# EAGLE board MICRO_SQUARED_SENSING_MCP1700_3 (EAGLE 7.5.0)
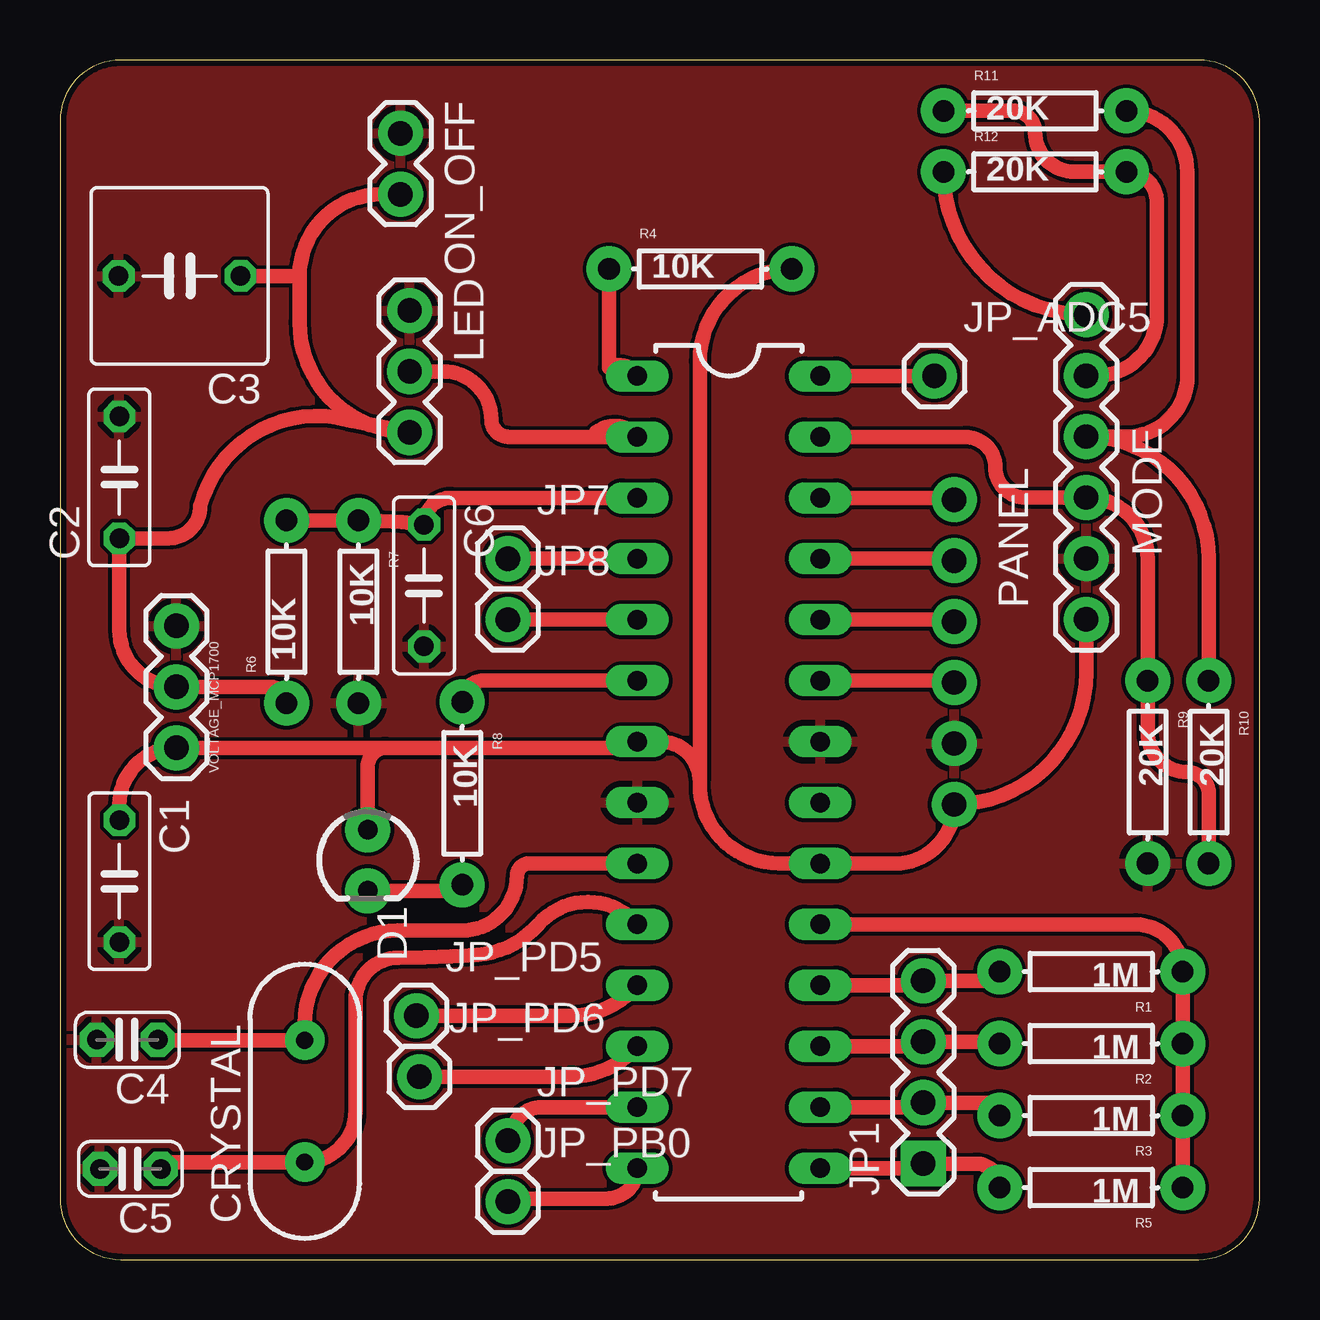
[diagram p0: board, top side]
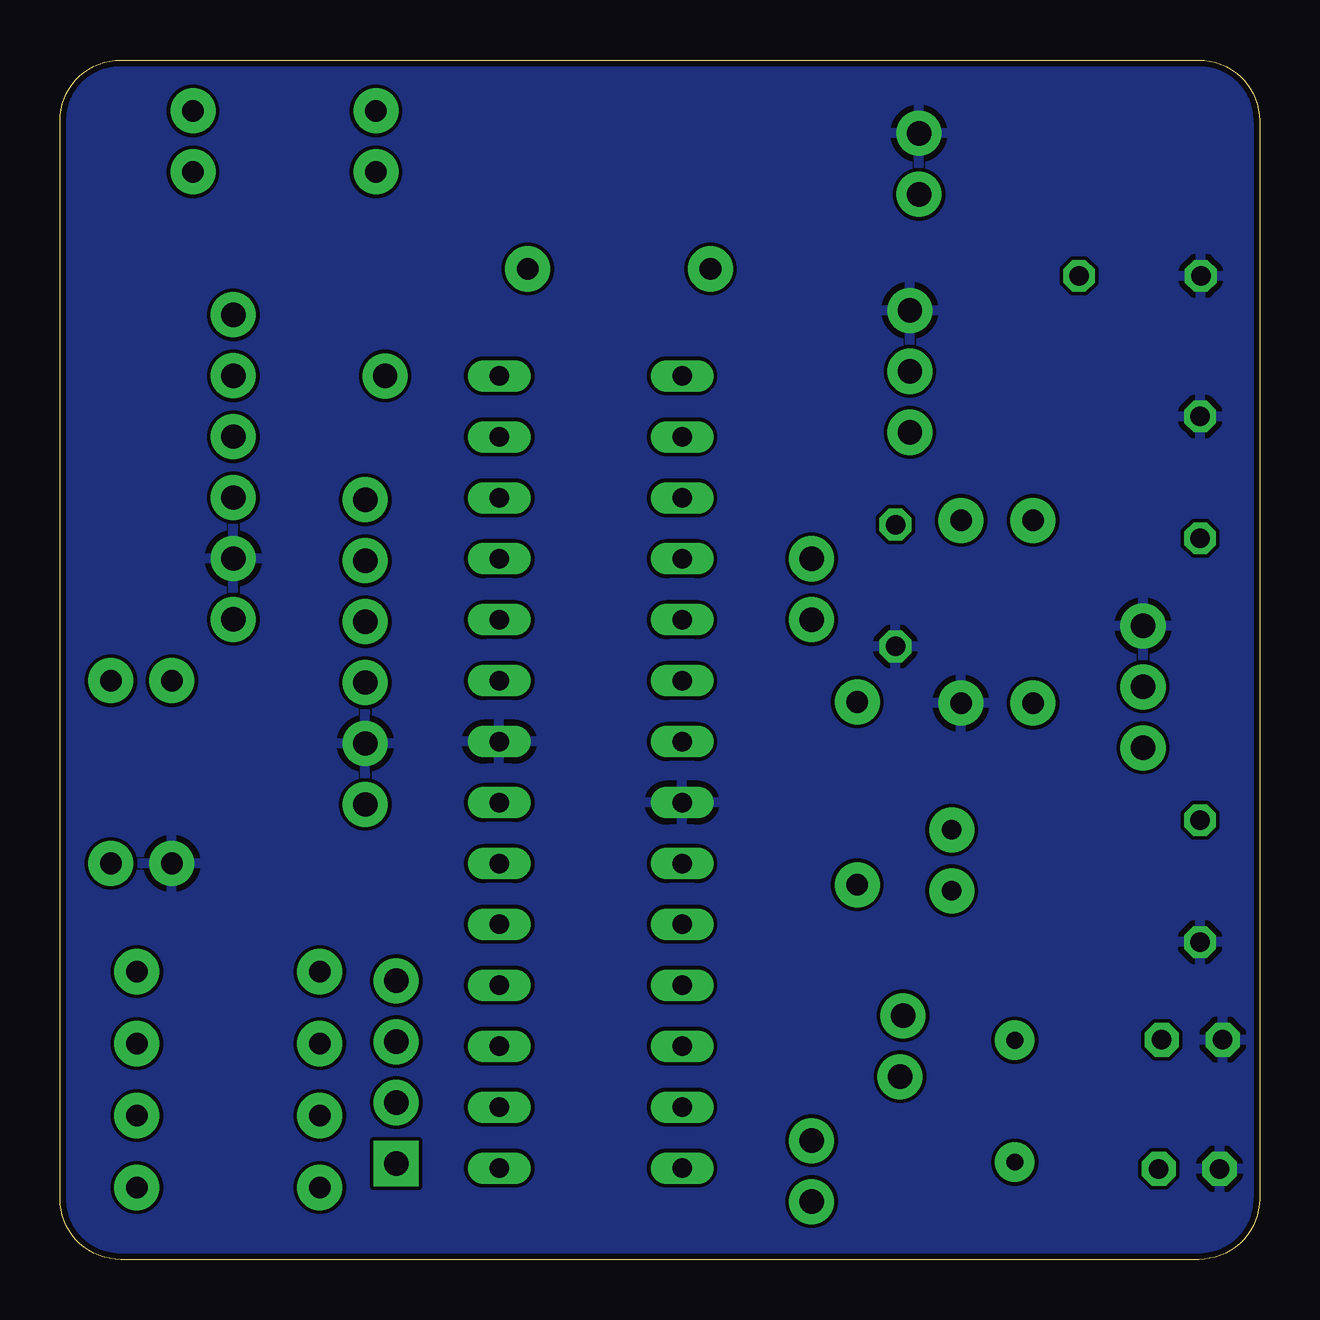
[diagram p1: board, bottom side, seen from below]

Size 50 x 50 mm. Coordinates in mm from the lower left corner, seen from the top.
Outline: 0,47.46 0,2.54 arc90 2.54,0 47.46,0 arc90 50,2.54 50,47.46 arc90 47.46,50 2.54,50 arc90 0,47.46
Copper layers (1*16): Top 0.035mm / dielectric 1.5mm / Bottom 0.035mm
Design rules "seeedstudio_2l_gru": minimum track width 6mil, minimum drill 12mil, track to track 6mil, track to pad 6mil, pad to pad 6mil, via to via 6mil, smd to smd 0mil, copper to edge 10mil, drill to drill 10mil, minimum pad ring 10mil, minimum via ring 6mil, stop-mask expansion 2mil, vias tented up to drill 100mil, thermal gap 10mil
Net classes: 0 default: width 0.254 mm

## Footprints (pad centres in the part's own frame; a part is rotated, then mirrored left to right if it is on the bottom)
DIL-28-3 = drill 0.813 long: 1 -16.51,-3.81; 2 -13.97,-3.81; 3 -11.43,-3.81; 4 -8.89,-3.81; 5 -6.35,-3.81; 6 -3.81,-3.81; 7 -1.27,-3.81; 8 1.27,-3.81; 9 3.81,-3.81; 10 6.35,-3.81; 11 8.89,-3.81; 12 11.43,-3.81; 13 13.97,-3.81; 14 16.51,-3.81; 15 16.51,3.81; 16 13.97,3.81; 17 11.43,3.81; 18 8.89,3.81; 19 6.35,3.81; 20 3.81,3.81; 21 1.27,3.81; 22 -1.27,3.81; 23 -3.81,3.81; 24 -6.35,3.81; 25 -8.89,3.81; 26 -11.43,3.81; 27 -13.97,3.81; 28 -16.51,3.81
C050-025X075 = drill 0.813 octagon: 1 -2.54,0; 2 2.54,0
C050-075X075 = drill 0.813 octagon: 1 -2.54,0; 2 2.54,0
C025-024X044 = drill 0.813 pad 1.422 octagon: 1 -1.27,0; 2 1.27,0
HC49US = drill 0.7 pad 1.651: 1 -2.54,0; 2 2.54,0
LED3MM = drill 0.813 pad 1.88: A -1.27,0; K 1.27,0
1X04 = drill 1.016 pad 1.88 square: 1 0,0 | drill 1.016 pad 1.88: 2 2.54,0; 3 5.08,0; 4 7.62,0
1X01 = drill 1.016 pad 1.88: 1 0,0
1X03 = drill 1.016 pad 1.88: 1 0,0; 2 2.54,0; 3 5.08,0
1X06 = drill 1.016 pad 1.88: 1 0,0; 2 2.54,0; 3 5.08,0; 4 7.62,0; 5 10.16,0; 6 12.7,0
1X02 = drill 1.016 pad 1.88: 1 0,0; 2 2.54,0
1X06_NO_SILK = drill 1.016 pad 1.88: 1 0,0; 2 2.54,0; 3 5.08,0; 4 7.62,0; 5 10.16,0; 6 12.7,0
AXIAL-0.3 = drill 0.9 pad 1.88: P$1 -3.81,0; P$2 3.81,0

## Placement (x,y rotation side)
BRAIN  ATMEGA328P_PDIP  [DIL-28-3]  27.88,20.32 270 top
C1  1u  [C050-025X075]  2.48,15.77 270 top
C2  1u  [C050-025X075]  2.47,32.6 90 top
C3  1000uF  [C050-075X075]  4.98,41 180 top
C4  22pF  [C025-024X044]  2.8,9.16 180 top
C5  22pF  [C025-024X044]  2.93,3.78 180 top
C6  1u  [C050-025X075]  15.17,28.09 270 top
CRYSTAL  [HC49US]  10.2,6.6 90 top
D1  [LED3MM]  12.83,16.64 270 top
JP1  [1X04]  35.98,4 90 top
JP7  [1X01]  18.67,29.21 0 top
JP8  [1X01]  18.67,26.67 0 top
JP_ADC5  [1X01]  36.45,36.83 0 top
JP_PB0  [1X01]  18.67,2.41 0 top
JP_PD5  [1X01]  14.86,10.16 0 top
JP_PD6  [1X01]  14.99,7.62 0 top
JP_PD7  [1X01]  18.67,4.95 0 top
LED  [1X03]  14.57,39.56 270 top
MODE  [1X06]  42.77,26.68 90 top
ON_OFF  [1X02]  14.19,46.94 270 top
PANEL  [1X06_NO_SILK]  37.27,31.67 270 top
R1  1M  [AXIAL-0.3]  42.98,12 180 top
R2  1M  [AXIAL-0.3]  42.98,9 180 top
R3  1M  [AXIAL-0.3]  42.98,6 180 top
R4  10K  [AXIAL-0.3]  26.69,41.29 0 top
R5  1M  [AXIAL-0.3]  42.98,3 180 top
R6  10K  [AXIAL-0.3]  9.44,27 90 top
R7  10K  [AXIAL-0.3]  12.44,27 270 top
R8  10K  [AXIAL-0.3]  16.76,19.43 270 top
R9  20K  [AXIAL-0.3]  45.34,20.32 270 top
R10  20K  [AXIAL-0.3]  47.88,20.32 270 top
R11  20K  [AXIAL-0.3]  40.64,47.88 0 top
R12  20K  [AXIAL-0.3]  40.64,45.34 0 top
VOLTAGE_MCP1700  [1X03]  4.85,21.33 90 top

## Library data of the parts
BRAIN = RodrigoMarques_Parts
C1-C6 = adafruit
CRYSTAL = SparkFun-FreqCtrl
D1 = SparkFun-LED
JP1 JP7 JP8 JP_ADC5 JP_PB0 JP_PD5-JP_PD7 LED ON_OFF VOLTAGE_MCP1700 = SparkFun-Connectors
MODE PANEL = SparkFun-Connectors; PROD_ID: CONN-08437
R1-R12 = SparkFun-Passives

## Nets
BLUE_BRAIN: BRAIN.25 PANEL.2
GND: BRAIN.8 BRAIN.22 C1.2 C2.2 C3.2 C4.2 C5.2 C6.2 LED.1 MODE.2 ON_OFF.1 PANEL.5 R7.P$2 R9.P$2 VOLTAGE_MCP1700.3
GREEN_BRAIN: BRAIN.24 PANEL.3
LEDS_BRAIN: BRAIN.2 LED.2
N$1: BRAIN.3 C6.1 R6.P$2 R7.P$1
N$2: BRAIN.15 JP1.1 R5.P$2
N$3: BRAIN.16 JP1.2 R3.P$2
N$4: BRAIN.17 JP1.3 R2.P$2
N$5: BRAIN.18 JP1.4 R1.P$2
N$6: BRAIN.19 R1.P$1 R2.P$1 R3.P$1 R5.P$1
N$7: BRAIN.9 C4.1 CRYSTAL.2
N$8: BRAIN.10 C5.1 CRYSTAL.1
N$9: BRAIN.5 JP8.1
N$10: D1.K R8.P$2
N$11: BRAIN.6 R8.P$1
N$12: BRAIN.4 JP7.1
N$13: BRAIN.27 MODE.3 R9.P$1 R10.P$2
N$14: BRAIN.12 JP_PD6.1
N$15: BRAIN.13 JP_PD7.1
N$16: BRAIN.14 JP_PB0.1
N$17: BRAIN.28 JP_ADC5.1
N$18: BRAIN.11 JP_PD5.1
N$19: MODE.6 R12.P$1
N$20: MODE.5 R11.P$1 R12.P$2
N$21: MODE.4 R10.P$1 R11.P$2
RED_BRAIN: BRAIN.26 PANEL.1
RST: BRAIN.1 R4.P$1
SPEED_BRAIN: BRAIN.23 PANEL.4
SWITCH_BRAIN: C2.1 C3.1 LED.3 ON_OFF.2 R6.P$1 VOLTAGE_MCP1700.2
V_5V: BRAIN.7 BRAIN.20 C1.1 D1.A MODE.1 PANEL.6 R4.P$2 VOLTAGE_MCP1700.1

## Tracks (layer width: path | path; a pad name or v marks a point on that pad's centre or on a via)
BLUE_BRAIN
  Top 0.61: BRAIN.25 37.19,29.21 arc-90 PANEL.2
GND
  pour Bottom: -9,58 -9,-9 60,-9 60,58
  pour Top: -5,54 -5,-5 56,-5 56,55 -5,55
GREEN_BRAIN
  Top 0.61: BRAIN.24 37.19,26.67 arc-90 PANEL.3
LEDS_BRAIN
  Top 0.61: 22.35,34.48 arc-90 BRAIN.2 18.69,34.29 arc-90 17.98,35 arc90 15.96,37.02 LED.2
N$1
  Top 0.61: R6.P$2 R7.P$1 arc-7 C6.1 arc-90 16.29,31.75 BRAIN.3 22,31.75
N$2
  Top 0.61: BRAIN.15 35.79,3.81 arc90 JP1.1 38.17,4 arc-90 R5.P$2
N$3
  Top 0.61: BRAIN.16 35.79,6.35 arc90 JP1.2 38.63,6.54 arc-90 R3.P$2
N$4
  Top 0.61: BRAIN.17 35.79,8.89 arc90 JP1.3 39.09,9.08 arc-90 R2.P$2
N$5
  Top 0.61: BRAIN.18 35.79,11.43 arc90 JP1.4 38.79,11.62 arc90 R1.P$2
N$6
  Top 0.61: BRAIN.19 44.82,13.97 arc-90 R1.P$1 R2.P$1 R3.P$1 R5.P$1
N$7
  Top 0.406: C4.1 arc90 4.09,9.14
  Top 0.61: 4.09,9.14 CRYSTAL.2 10.2,9.82 arc-90 14.1,13.72 16.76,13.72 arc90 19.05,16 arc-90 19.56,16.51 BRAIN.9
N$8
  Top 0.406: C5.1 arc-90 4.48,4.06
  Top 0.61: 4.48,4.06 CRYSTAL.1 arc90 12.32,6.17 12.32,10.79 arc-90 14.1,12.57 arc4 17.4,12.7 arc44 19.94,13.97 arc-97 BRAIN.10
N$9
  Top 0.61: JP8.1 BRAIN.5
N$10
  Top 0.61: D1.K 16.51,15.37 arc90 R8.P$2
N$11
  Top 0.61: R8.P$1 arc-90 17.65,24.13 BRAIN.6
N$12
  Top 0.61: JP7.1 BRAIN.4
N$13
  Top 0.61: MODE.3 arc90 42.78,31.75 | BRAIN.27 37.72,34.29 arc-90 38.99,33.02 arc90 40.25,31.76 MODE.3 | R10.P$2 47.88,19.43 arc90 46.99,20.32 arc-90 45.34,21.97 R9.P$1 45.34,29.2 arc90 MODE.3
N$14
  Top 0.61: JP_PD6.1 21.27,7.62 arc49 BRAIN.12
N$15
  Top 0.61: JP_PD7.1 arc-90 18.8,5.08 arc-90 20.07,6.35 BRAIN.13
N$16
  Top 0.61: JP_PB0.1 arc-90 18.8,2.54 22.8,2.54 arc90 BRAIN.14
N$17
  Top 0.61: BRAIN.28 JP_ADC5.1
N$18
  Top 0.61: JP_PD5.1 21.27,10.16 arc49 BRAIN.11
N$19
  Top 0.61: R12.P$1 36.83,45.32 arc90 MODE.6
N$20
  Top 0.61: R11.P$1 39.75,47.88 arc-90 40.64,46.99 arc90 42.29,45.34 R12.P$2 arc-90 45.72,44.07 45.72,39.37 arc-90 43.19,36.84 MODE.5
N$21
  Top 0.61: R10.P$1 47.88,29.2 arc90 MODE.4 44.46,34.3 arc90 46.99,36.83 46.99,45.34 arc90 R11.P$2
RED_BRAIN
  Top 0.61: BRAIN.26 37.19,31.75 arc-90 PANEL.1
RST
  Top 0.61: R4.P$1 22.88,37.17 arc-90 BRAIN.1
SPEED_BRAIN
  Top 0.61: BRAIN.23 37.19,24.13 arc-90 PANEL.4
SWITCH_BRAIN
  Top 0.61: ON_OFF.2 13.38,44.4 arc90 9.98,41 | C3.1 9.98,41 | 9.98,41 9.98,39.07 arc90 LED.3 11.98,35 arc90 5.85,31.41 arc-90 4.5,30.06 C2.1 2.47,26.25 arc90 VOLTAGE_MCP1700.2 8.76,23.87 arc-90 R6.P$1
V_5V
  Top 0.61: BRAIN.7 24.39,21.59 | 13.59,21.33 VOLTAGE_MCP1700.1 arc90 2.48,18.95 C1.1 | 13.59,21.33 23.81,21.33 arc90 BRAIN.7 | D1.A 12.83,20.57 arc-90 13.59,21.33 | 26.67,19.94 26.67,19.81 arc90 29.97,16.51 BRAIN.20 34.81,16.51 arc90 PANEL.6 arc90 42.77,24.47 MODE.1 | 26.67,19.94 arc90 25.02,21.59 BRAIN.7 | R4.P$2 arc90 26.67,37.46 26.67,19.94